# EAGLE board Layer 1 (EAGLE 9.6.2)
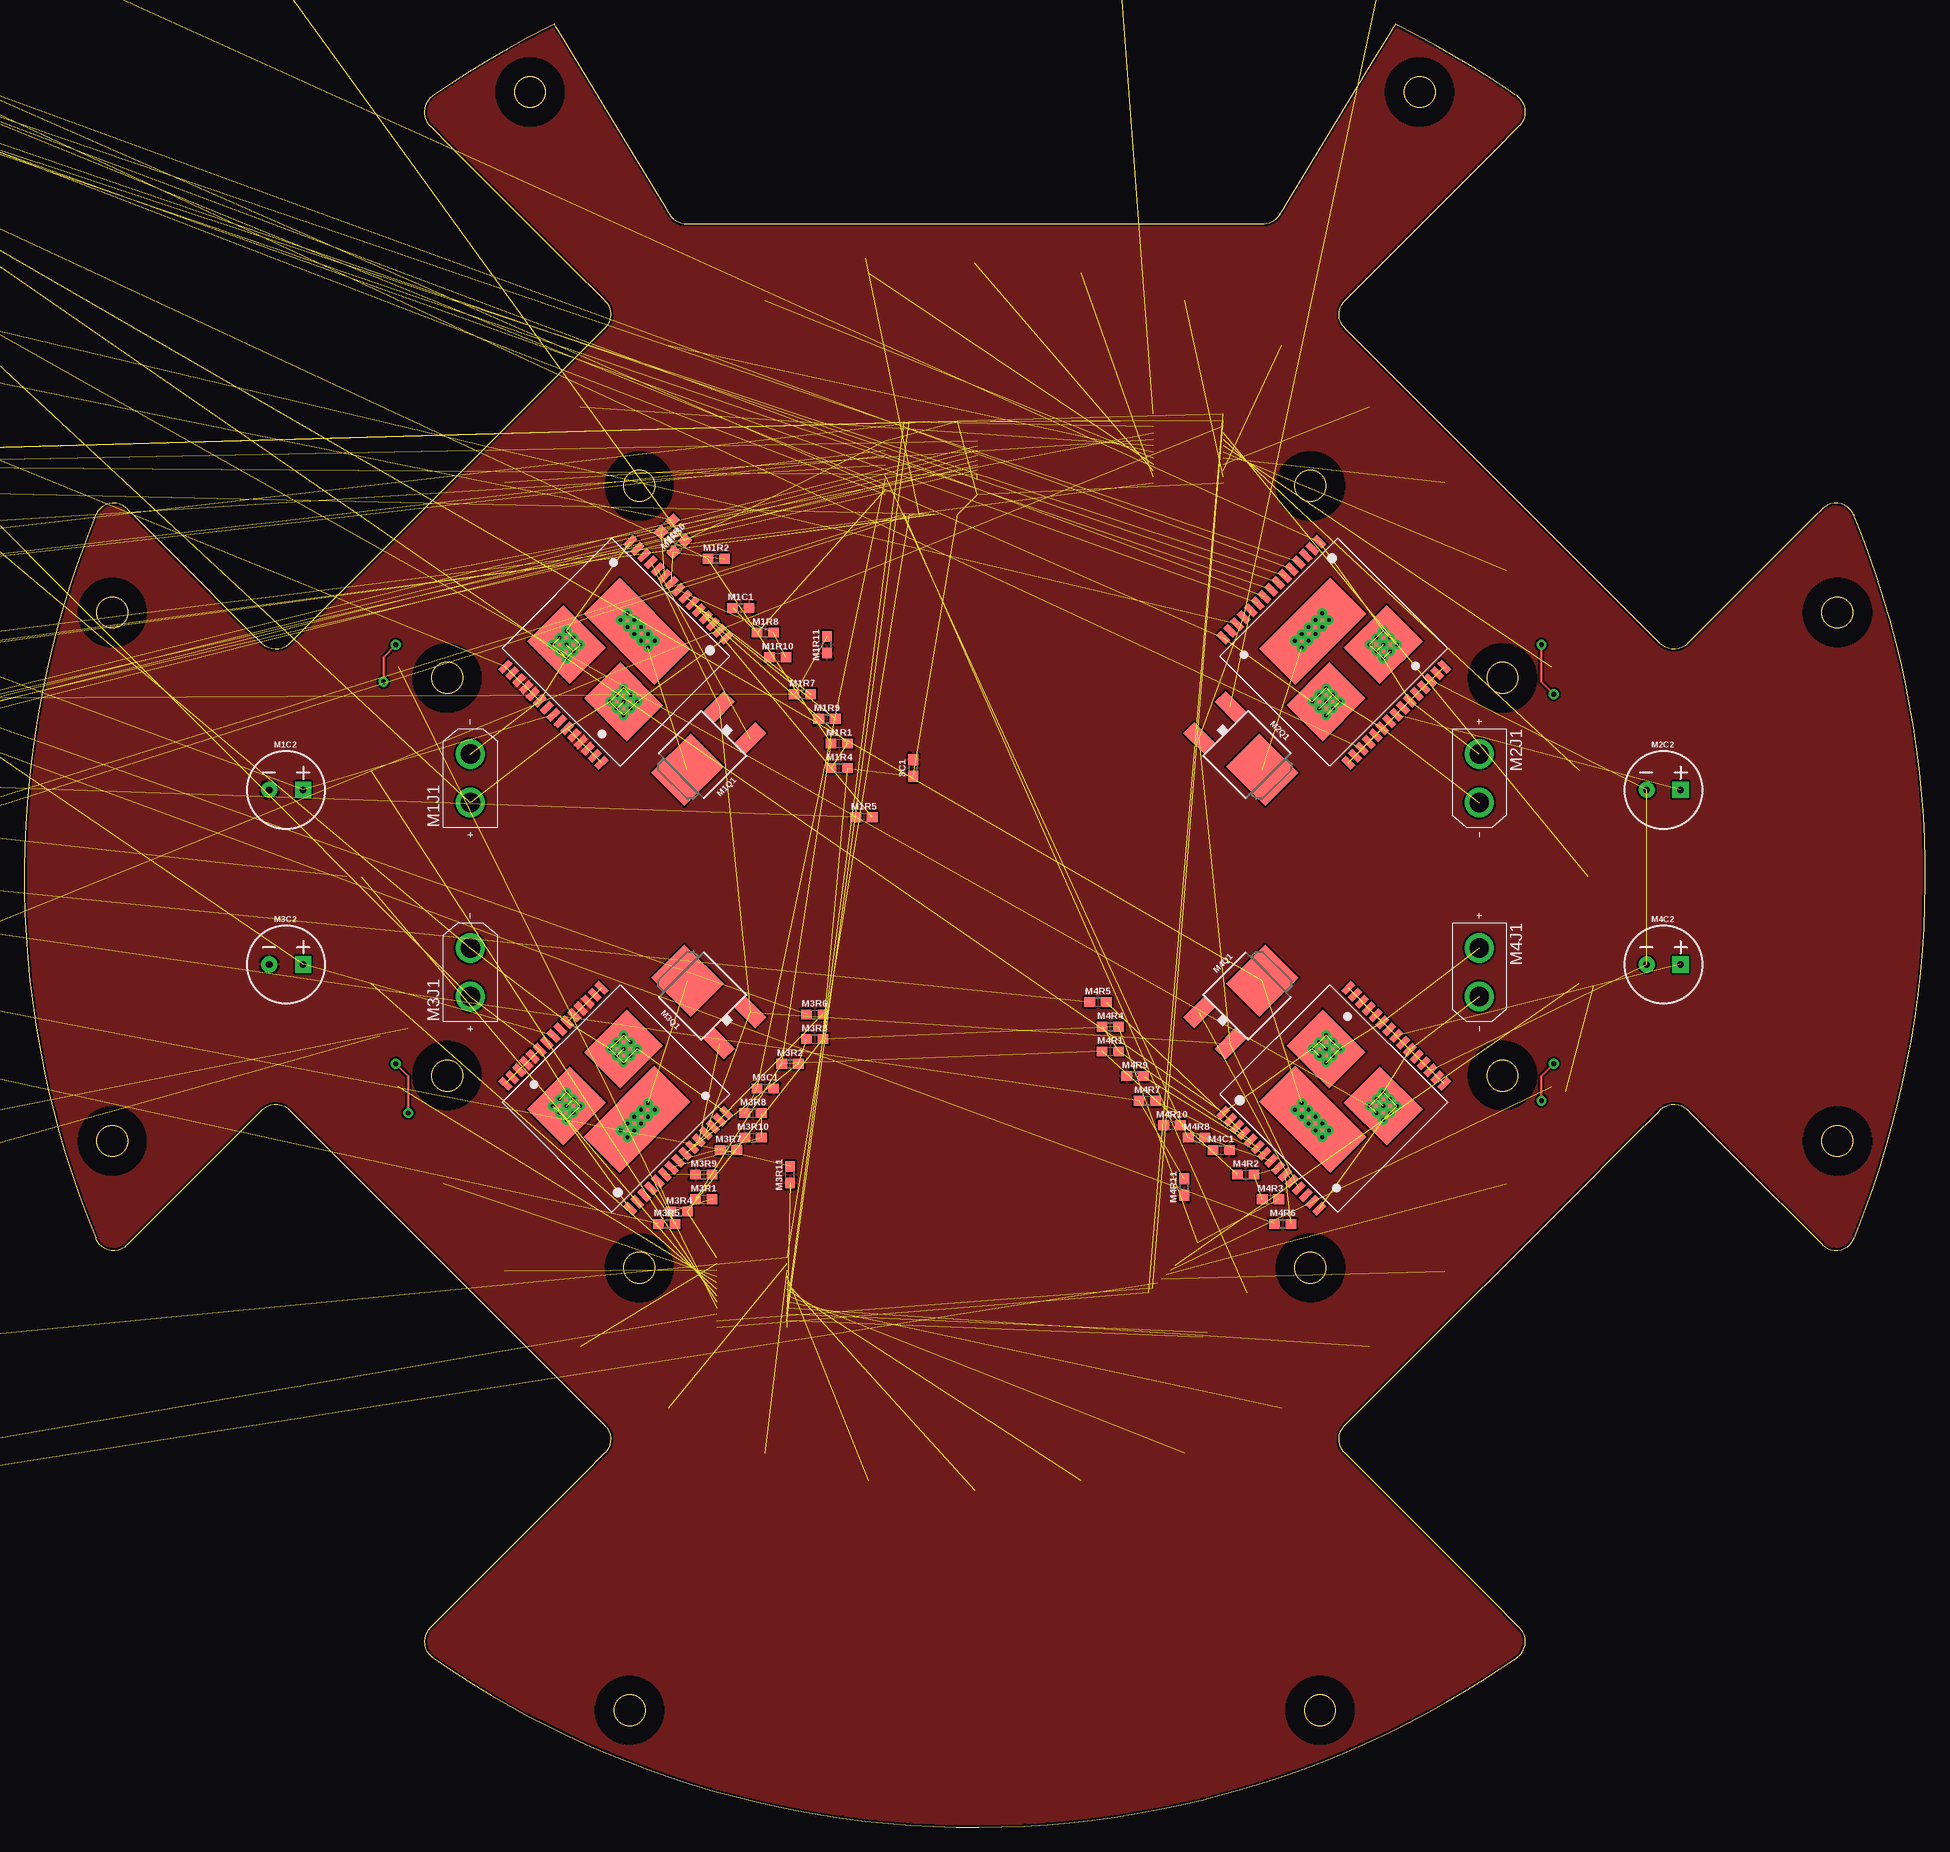
[diagram p0: board, top side]
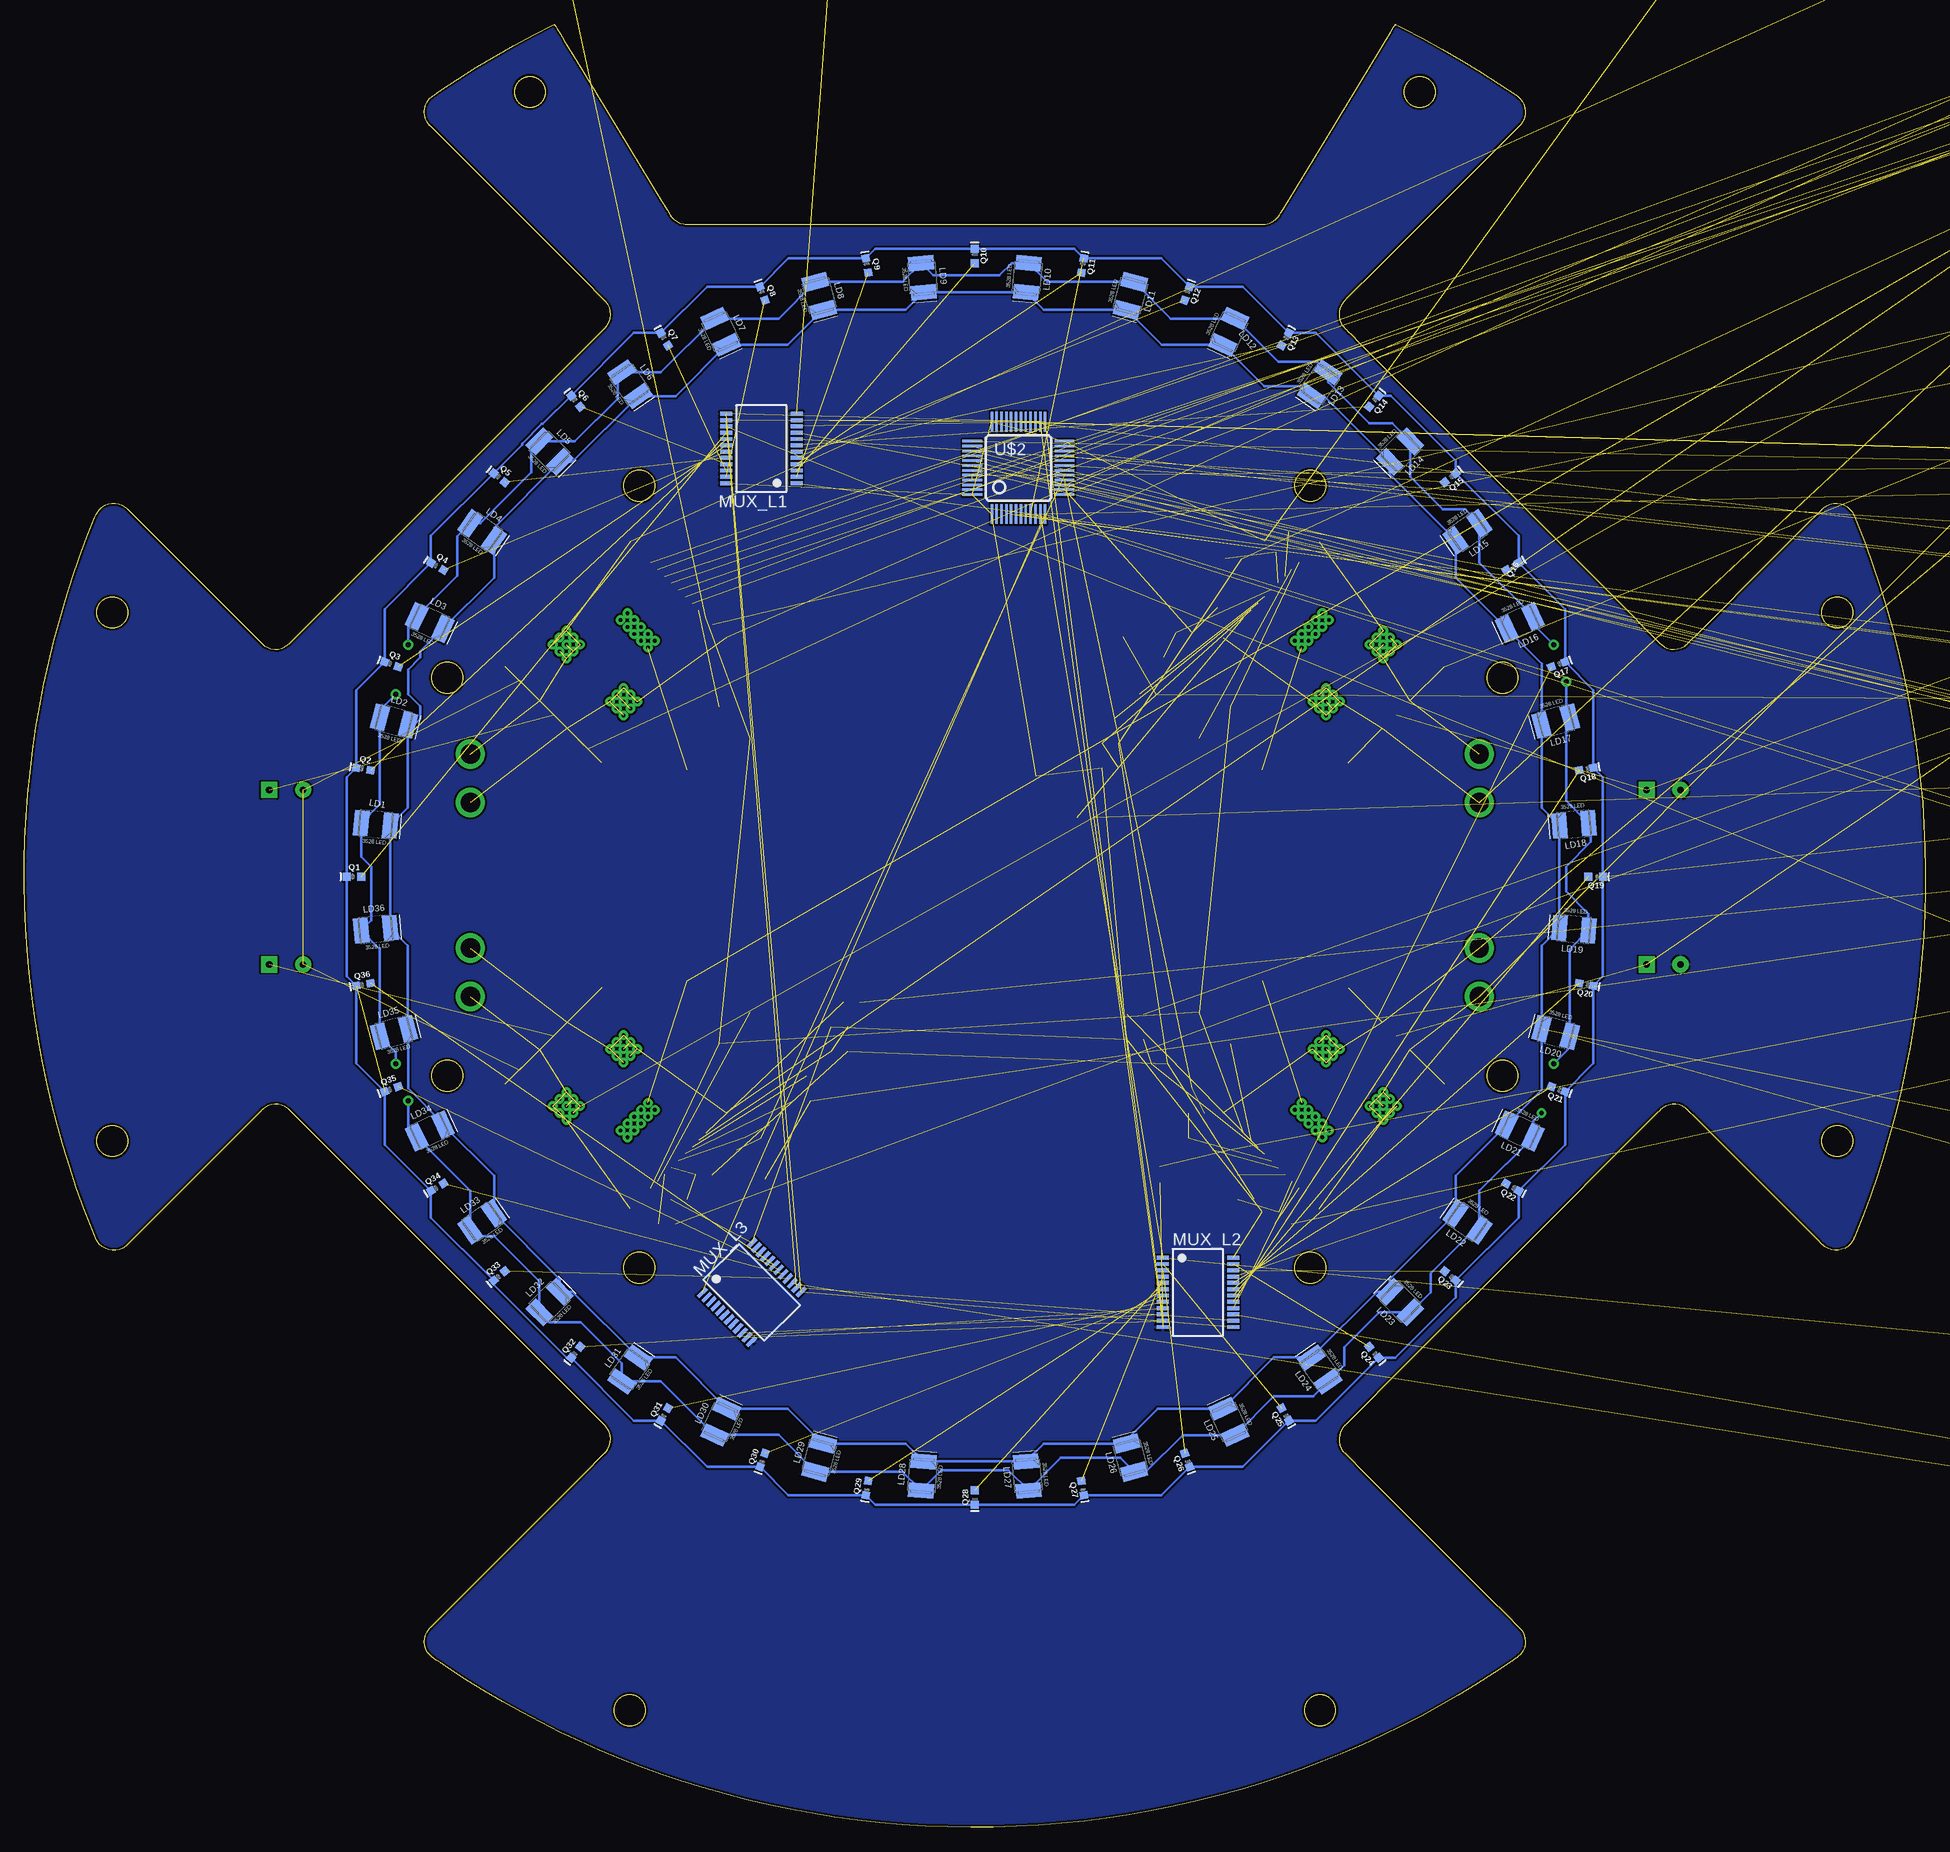
[diagram p1: board, bottom side, seen from below]

Size 195.99 x 185.89 mm. Coordinates in mm from the lower left corner, seen from the top.
Outline: 510 segments
Outline: circle at 186.92,70.75 radius 1.6
Outline: circle at 132.59,57.7 radius 1.6
Outline: circle at 62.41,12.08 radius 1.6
Outline: circle at 43.6,77.49 radius 1.6
Outline: circle at 9.08,125.24 radius 1.6
Outline: circle at 63.4,138.3 radius 1.6
Outline: circle at 143.86,178.91 radius 1.6
Outline: circle at 152.39,118.5 radius 1.6
Outline: circle at 132.59,138.3 radius 1.6
Outline: circle at 52.14,178.91 radius 1.6
Outline: circle at 43.6,118.5 radius 1.6
Outline: circle at 9.08,70.75 radius 1.6
Outline: circle at 63.4,57.7 radius 1.6
Outline: circle at 133.59,12.08 radius 1.6
Outline: circle at 152.39,77.49 radius 1.6
Outline: circle at 186.92,125.24 radius 1.6
Copper layers (1*16): Top 0.035mm / dielectric 1.5mm / Bottom 0.035mm
Design rules "SparkFun *": minimum track width 8mil, minimum drill 20mil, track to track 8mil, track to pad 8mil, pad to pad 8mil, via to via 8mil, smd to smd 8mil, copper to edge 10mil, drill to drill 8mil, minimum pad ring 12mil, minimum via ring 10mil, stop-mask expansion 4mil, vias tented up to drill 25mil, thermal gap 10mil
tRestrict: area 48.6,175.4 to 55.6,182.4; area 140.4,175.4 to 147.4,182.4; area 183.4,121.7 to 190.4,128.7; area 183.4,67.3 to 190.4,74.3; area 130.1,8.6 to 137.1,15.6; area 58.9,8.6 to 65.9,15.6; area 5.6,67.3 to 12.6,74.3; area 5.6,121.7 to 12.6,128.7; area 59.9,134.8 to 66.9,141.8; area 40.1,115 to 47.1,122; area 40.1,74 to 47.1,81; area 59.9,54.2 to 66.9,61.2; 4 more areas

## Footprints (pad centres in the part's own frame; a part is rotated, then mirrored left to right if it is on the bottom)
C0603 = smd 1.1 x 1: 1 -0.85,0; 2 0.85,0
C1210 = smd 1.27 x 2.06: 1 -1.755,0; 2 1.755,0
EIA7343 = smd 2.55 x 2.7: A 3.17,0; C -3.17,0
SMA-DIODE = smd 1.27 x 1.47: A -2.15,0; C 2.15,0
SWPA8040 = smd 2.2 x 7.5: P1 -3,0; P2 3,0
R0603 = smd 1.1 x 1: 1 -0.85,0; 2 0.85,0
MOMENTARY_SWITCH_4X3 = smd 1.3 x 1.6: P$1 -2.25,0; P$2 2.25,0
LED-0603 = smd 1 x 1: A -0.877,0; C 0.877,0
1X03_LOCK = drill 1.016 pad 1.88: 1 0,0.127; 2 2.54,-0.127; 3 5.08,0.127
XT30PB-F = drill 2: + -2.5,0; - 2.5,0
0603 = smd 1.1 x 1: 1 -0.85,0; 2 0.85,0
18AWG = drill 1.3: P$1 0,0
1X02_LOCK = drill 1.016 pad 1.88: 1 -0.178,0; 2 2.718,0
3528 = smd 1.5 x 2.6: A -1.5,0; C 1.5,0
1X02_NO_SILK = drill 1.016 pad 1.88: 1 0,0; 2 2.54,0
MOLEX-1X2 = drill 1.016 pad 1.88 square: 1 0,0 | drill 1.016 pad 1.88: 2 2.54,0
SWITCH_SPDT_PTH_11.6X4.0MM_LOCK = drill 1.016 pad 1.88: 1 0,2.718; 2 0,0; 3 0,-2.718
3.5MM_CAP = drill 0.7 pad 1.651 square: 1 1.75,0 | drill 0.7 pad 1.651: 2 -1.75,0
DPAK = smd 1.6 x 3: 1 -2.28,-5.31; 3 2.28,-5.31 | smd 4.826 x 5.715: 4 0,1.588
POWERSO-30 = smd 0.65 x 1.4: P1 -7,-9.1; P2 -6,-9.1; P3 -5,-9.1; P4 -4,-9.1; P5 -3,-9.1; P6 -2,-9.1; P7 -1,-9.1; P8 0,-9.1; P9 1,-9.1; P10 2,-9.1; P11 3,-9.1; P12 4,-9.1; P13 5,-9.1; P14 6,-9.1; P15 7,-9.1; P16 7,9.1; P17 6,9.1; P18 5,9.1; P19 4,9.1; P20 3,9.1; P21 2,9.1; P22 1,9.1; P23 0,9.1; P24 -1,9.1; P25 -2,9.1; P26 -3,9.1; P27 -4,9.1; P28 -5,9.1; P29 -6,9.1; P30 -7,9.1 | drill 0.381: P$1 -4.165,3.05; P$2 -3.165,3.05; P$3 -5.165,3.05; P$4 -5.165,2.05; P$5 -4.165,2.05; P$6 -3.165,2.05; P$7 -5.165,4.05; P$8 -4.165,4.05; P$9 -3.165,4.05; P$10 4.165,3.05; P$11 5.165,3.05; P$12 3.165,3.05; P$13 3.165,2.05; P$14 4.165,2.05; P$15 5.165,2.05; P$16 3.165,4.05; P$17 4.165,4.05; P$18 5.165,4.05; P$19 0,-2.669; P$20 -1,-2.669; P$21 1,-2.669; P$22 -2,-2.669; P$23 2,-2.669; P$24 0,-3.669; P$25 1,-3.669; P$26 2,-3.669; P$27 -1,-3.669; P$28 -2,-3.669 | smd 10.3 x 5.25: SLUG1 0,-3.05 | smd 6.23 x 5.25: SLUG2 -4.165,3.05; SLUG3 4.165,3.05
1X08_LOCK = drill 1.016 pad 1.88: 1 0,0.127; 2 2.54,-0.127; 3 5.08,0.127; 4 7.62,-0.127; 5 10.16,0.127; 6 12.7,-0.127; 7 15.24,0.127; 8 17.78,-0.127
SOT23-6 = smd 0.55 x 1.2: 1 -0.95,-1.3; 2 0,-1.3; 3 0.95,-1.3; 4 0.95,1.3; 5 0,1.3; 6 -0.95,1.3
SSOP24 = smd 0.4 x 1.25: 1 -3.575,-3.625; 2 -2.925,-3.625; 3 -2.275,-3.625; 4 -1.625,-3.625; 5 -0.975,-3.625; 6 -0.325,-3.625; 7 0.325,-3.625; 8 0.975,-3.625; 9 1.625,-3.625; 10 2.275,-3.625; 11 2.925,-3.625; 12 3.575,-3.625; 13 3.575,3.625; 14 2.925,3.625; 15 2.275,3.625; 16 1.625,3.625; 17 0.975,3.625; 18 0.325,3.625; 19 -0.325,3.625; 20 -0.975,3.625; 21 -1.625,3.625; 22 -2.275,3.625; 23 -2.925,3.625; 24 -3.575,3.625
ALS-PT19 = smd 0.8 x 0.8: C -0.75,0; E 0.75,0
SOT23-3 = smd 0.8 x 0.9: 1 -0.95,-1; 2 0.95,-1; 3 0,1.1
POWERPAD-SOIC-8 = smd 1.981 x 0.559: 1 -2.464,1.905; 2 -2.464,0.635; 3 -2.464,-0.635; 4 -2.464,-1.905; 5 2.464,-1.905; 6 2.464,-0.635; 7 2.464,0.635; 8 2.464,1.905 | smd 2.007 x 2.489: 9 0,0 | drill 0.381: P$1 -0.5,0.8; P$2 0.5,0.8; P$3 -0.5,0; P$4 0.5,0; P$5 -0.5,-0.8; P$6 0.5,-0.8
XT60PB-M = drill 4.4: + -3.6,0; - 3.6,0
LQFP48 = smd 0.254 x 2.032: 1 -2.75,-4.758; 2 -2.25,-4.758; 3 -1.75,-4.758; 4 -1.25,-4.758; 5 -0.75,-4.758; 6 -0.25,-4.758; 7 0.25,-4.758; 8 0.75,-4.758; 9 1.25,-4.758; 10 1.75,-4.758; 11 2.25,-4.758; 12 2.75,-4.758; 25 2.75,4.758; 26 2.25,4.758; 27 1.75,4.758; 28 1.25,4.758; 29 0.75,4.758; 30 0.25,4.758; 31 -0.25,4.758; 32 -0.75,4.758; 33 -1.25,4.758; 34 -1.75,4.758; 35 -2.25,4.758; 36 -2.75,4.758 | smd 2.032 x 0.254: 13 4.758,-2.75; 14 4.758,-2.25; 15 4.758,-1.75; 16 4.758,-1.25; 17 4.758,-0.75; 18 4.758,-0.25; 19 4.758,0.25; 20 4.758,0.75; 21 4.758,1.25; 22 4.758,1.75; 23 4.758,2.25; 24 4.758,2.75; 37 -4.758,2.75; 38 -4.758,2.25; 39 -4.758,1.75; 40 -4.758,1.25; 41 -4.758,0.75; 42 -4.758,0.25; 43 -4.758,-0.25; 44 -4.758,-0.75; 45 -4.758,-1.25; 46 -4.758,-1.75; 47 -4.758,-2.25; 48 -4.758,-2.75
2X7 = drill 1.016 pad 1.88: 1 0,0; 2 0,2.54; 3 2.54,0; 4 2.54,2.54; 5 5.08,0; 6 5.08,2.54; 7 7.62,0; 8 7.62,2.54; 9 10.16,0; 10 10.16,2.54; 11 12.7,0; 12 12.7,2.54; 13 15.24,0; 14 15.24,2.54
SM06B-SRSS-TB = smd 0.6 x 1.55: 1 2.5,0; 2 1.5,0; 3 0.5,0; 4 -0.5,0; 5 -1.5,0; 6 -2.5,0 | smd 1.2 x 1.8: M1 3.8,3.875; M2 -3.8,3.875
CRYSTAL-SMD-5X3.2-2PAD = smd 1.7 x 2.4: P$1 1.85,0; P$2 -1.85,0

## Placement (x,y rotation side)
1C1  4.7uF  [C0603]  not placed on the board
1C2  22uF  [C1210]  not placed on the board
1C3  10nF  [C0603]  not placed on the board
1C4  220uF  [EIA7343]  not placed on the board
1C5  0.1uF  [C0603]  not placed on the board
1C6  4.7uF  [C0603]  not placed on the board
1C7  220uF  [EIA7343]  not placed on the board
1C8  10nF  [C0603]  not placed on the board
1C9  0.1uF  [C0603]  not placed on the board
1C10  22uF  [C1210]  not placed on the board
1D1  SS54  [SMA-DIODE]  not placed on the board
1D2  SS54  [SMA-DIODE]  not placed on the board
1L1  10uH  [SWPA8040]  not placed on the board
1L2  10uH  [SWPA8040]  not placed on the board
1R1  10k  [R0603]  not placed on the board
1R2  5.9k  [R0603]  not placed on the board
1R3  10k  [R0603]  not placed on the board
1R4  3.24k  [R0603]  not placed on the board
2C1  0.1uF  [C0603]  not placed on the board
2C2  0.1uF  [C0603]  not placed on the board
2C3  0.1uF  [C0603]  not placed on the board
2C4  1uF  [C0603]  not placed on the board
2C5  1uF  [C0603]  not placed on the board
2C6  1uF  [C0603]  not placed on the board
2R1  1k  [R0603]  not placed on the board
2R2  1k  [R0603]  not placed on the board
2R3  1k  [R0603]  not placed on the board
2R4  3k  [R0603]  not placed on the board
2R5  3k  [R0603]  not placed on the board
2R6  3k  [R0603]  not placed on the board
3C1  0.1uF  [C0603]  91.65,109.21 90 top
3C2  0.1uF  [C0603]  not placed on the board
BOOT  MOMENTARY_SWITCH_4X3  [MOMENTARY_SWITCH_4X3]  not placed on the board
C1  1uF  [C0603]  not placed on the board
C2  1uF  [C0603]  not placed on the board
C3  1uF  [C0603]  not placed on the board
C4  10nF  [C0603]  not placed on the board
C5  1uF  [C0603]  not placed on the board
C6  22pF  [C0603]  not placed on the board
C7  22pF  [C0603]  not placed on the board
C8  1uF  [C0603]  not placed on the board
D1  BLUE  [LED-0603]  not placed on the board
ESC_IN  [1X03_LOCK]  not placed on the board
ESC_OUT  XT30PB-F  [XT30PB-F]  not placed on the board
FB1  30Ω/1.8A  [0603]  not placed on the board
FB2  30Ω/1.8A  [0603]  not placed on the board
GND_M2A  18AWG  [18AWG]  not placed on the board
GND_M2B  18AWG  [18AWG]  not placed on the board
GND_M4A  18AWG  [18AWG]  not placed on the board
GND_M4B  18AWG  [18AWG]  not placed on the board
J1  [1X02_LOCK]  not placed on the board
LC1  1uF  [C0603]  not placed on the board
LC2  1uF  [C0603]  not placed on the board
LC3  1uF  [C0603]  not placed on the board
LC4  1uF  [C0603]  not placed on the board
LC5  1uF  [C0603]  not placed on the board
LC6  1uF  [C0603]  not placed on the board
LD1  3528LED  [3528]  159.76,103.4 355 bottom
LD2  3528LED  [3528]  157.88,114.05 345 bottom
LD3  3528LED  [3528]  154.19,124.2 335 bottom
LD4  3528LED  [3528]  148.78,133.56 325 bottom
LD5  3528LED  [3528]  141.84,141.84 315 bottom
LD6  3528LED  [3528]  133.56,148.79 305 bottom
LD7  3528LED  [3528]  124.2,154.19 295 bottom
LD8  3528LED  [3528]  114.04,157.89 285 bottom
LD9  3528LED  [3528]  103.4,159.76 275 bottom
LD10  3528LED  [3528]  92.59,159.76 265 bottom
LD11  3528LED  [3528]  81.95,157.89 255 bottom
LD12  3528LED  [3528]  71.79,154.19 245 bottom
LD13  3528LED  [3528]  62.44,148.79 235 bottom
LD14  3528LED  [3528]  54.16,141.84 225 bottom
LD15  3528LED  [3528]  47.21,133.56 215 bottom
LD16  3528LED  [3528]  41.81,124.2 205 bottom
LD17  3528LED  [3528]  38.11,114.05 195 bottom
LD18  3528LED  [3528]  36.23,103.4 185 bottom
LD19  3528LED  [3528]  36.23,92.6 175 bottom
LD20  3528LED  [3528]  38.11,81.95 165 bottom
LD21  3528LED  [3528]  41.81,71.8 155 bottom
LD22  3528LED  [3528]  47.21,62.44 145 bottom
LD23  3528LED  [3528]  54.16,54.16 135 bottom
LD24  3528LED  [3528]  62.44,47.21 125 bottom
LD25  3528LED  [3528]  71.79,41.81 115 bottom
LD26  3528LED  [3528]  81.95,38.11 105 bottom
LD27  3528LED  [3528]  92.59,36.24 95 bottom
LD28  3528LED  [3528]  103.4,36.24 85 bottom
LD29  3528LED  [3528]  114.04,38.11 75 bottom
LD30  3528LED  [3528]  124.2,41.81 65 bottom
LD31  3528LED  [3528]  133.56,47.21 55 bottom
LD32  3528LED  [3528]  141.84,54.16 45 bottom
LD33  3528LED  [3528]  148.78,62.44 35 bottom
LD34  3528LED  [3528]  154.19,71.8 25 bottom
LD35  3528LED  [3528]  157.88,81.95 15 bottom
LD36  3528LED  [3528]  159.76,92.6 5 bottom
LDR  [1X02_NO_SILK]  not placed on the board
LED  [MOLEX-1X2]  not placed on the board
LG_R2  2k  [R0603]  not placed on the board
LR1  47  [R0603]  not placed on the board
LS1  [SWITCH_SPDT_PTH_11.6X4.0MM_LOCK]  not placed on the board
M1C1  33nF  [C0603]  73.87,125.72 0 top
M1C2  680uF  [3.5MM_CAP]  27,106.96 0 top
M1C3  1.0uF  [C0603]  not placed on the board
M1D1  RED  [LED-0603]  not placed on the board
M1D2  BLUE  [LED-0603]  not placed on the board
M1J1  XT30PB-F  [XT30PB-F]  46,108.16 90 top
M1Q1  AOD482  [DPAK]  69.5,110.16 135 top
M1R1  1k  [R0603]  84.03,111.75 0 top
M1R2  1k  [R0603]  71.33,130.8 0 top
M1R3  3.3k  [R0603]  67.52,132.07 45 top
M1R4  3.3k  [R0603]  84.03,109.21 0 top
M1R5  1k  [R0603]  86.57,104.13 0 top
M1R6  1k  [R0603]  66.25,134.16 225 top
M1R7  1k  [R0603]  80.22,116.83 0 top
M1R8  10k  [R0603]  76.41,123.18 0 top
M1R9  10k  [R0603]  82.76,114.29 0 top
M1R10  1k  [R0603]  77.68,120.64 0 top
M1R11  10k  [R0603]  82.76,121.91 90 top
M1R12  4.7k  [R0603]  not placed on the board
M2C1  33nF  [C0603]  not placed on the board
M2C2  680uF  [3.5MM_CAP]  169,106.96 0 top
M2C3  1.0uF  [C0603]  not placed on the board
M2D1  RED  [LED-0603]  not placed on the board
M2D2  BLUE  [LED-0603]  not placed on the board
M2J1  XT30PB-F  [XT30PB-F]  150,108.16 270 top
M2Q1  AOD482  [DPAK]  126.5,110.16 225 top
M2R1  1k  [R0603]  not placed on the board
M2R2  1k  [R0603]  not placed on the board
M2R3  3.3k  [R0603]  not placed on the board
M2R4  3.3k  [R0603]  not placed on the board
M2R5  1k  [R0603]  not placed on the board
M2R6  1k  [R0603]  not placed on the board
M2R7  1k  [R0603]  not placed on the board
M2R8  10k  [R0603]  not placed on the board
M2R9  10k  [R0603]  not placed on the board
M2R10  1k  [R0603]  not placed on the board
M2R11  10k  [R0603]  not placed on the board
M2R12  4.7k  [R0603]  not placed on the board
M3C1  33nF  [C0603]  76.41,76.19 0 top
M3C2  680uF  [3.5MM_CAP]  27,88.96 0 top
M3C3  1.0uF  [C0603]  not placed on the board
M3D1  RED  [LED-0603]  not placed on the board
M3D2  BLUE  [LED-0603]  not placed on the board
M3J1  XT30PB-F  [XT30PB-F]  46,88.16 90 top
M3Q1  AOD482  [DPAK]  69.5,86.16 45 top
M3R1  1k  [R0603]  70.06,64.76 0 top
M3R2  1k  [R0603]  78.95,78.73 0 top
M3R3  3.3k  [R0603]  81.49,81.27 0 top
M3R4  3.3k  [R0603]  67.52,63.49 0 top
M3R5  1k  [R0603]  66.25,62.22 0 top
M3R6  1k  [R0603]  81.49,83.81 0 top
M3R7  1k  [R0603]  72.6,69.84 0 top
M3R8  10k  [R0603]  75.14,73.65 0 top
M3R9  10k  [R0603]  70.06,67.3 0 top
M3R10  1k  [R0603]  75.14,71.11 0 top
M3R11  10k  [R0603]  78.95,67.3 90 top
M3R12  4.7k  [R0603]  not placed on the board
M4C1  33nF  [C0603]  123.4,69.84 0 top
M4C2  680uF  [3.5MM_CAP]  169,88.96 0 top
M4C3  1.0uF  [C0603]  not placed on the board
M4D1  RED  [LED-0603]  not placed on the board
M4D2  BLUE  [LED-0603]  not placed on the board
M4J1  XT30PB-F  [XT30PB-F]  150,88.16 270 top
M4Q1  AOD482  [DPAK]  126.5,86.16 315 top
M4R1  1k  [R0603]  111.97,80 0 top
M4R2  1k  [R0603]  125.94,67.3 0 top
M4R3  3.3k  [R0603]  128.48,64.76 0 top
M4R4  3.3k  [R0603]  111.97,82.54 0 top
M4R5  1k  [R0603]  110.7,85.08 0 top
M4R6  1k  [R0603]  129.75,62.22 0 top
M4R7  1k  [R0603]  115.78,74.92 0 top
M4R8  10k  [R0603]  120.86,71.11 0 top
M4R9  10k  [R0603]  114.51,77.46 0 top
M4R10  1k  [R0603]  118.32,72.38 0 top
M4R11  10k  [R0603]  119.59,66.03 90 top
M4R12  4.7k  [R0603]  not placed on the board
M_BL  VNH5019  [POWERSO-30]  61,75.16 45 top
M_BR  VNH5019  [POWERSO-30]  135,75.16 315 top
M_FL  VNH5019  [POWERSO-30]  61,121.16 135 top
M_FR  VNH5019  [POWERSO-30]  135,121.16 225 top
MOUSE  [1X08_LOCK]  not placed on the board
MU1  [SOT23-6]  not placed on the board
MU2  [SOT23-6]  not placed on the board
MUX_L1  [SSOP24]  120,142.16 90 bottom
MUX_L2  [SSOP24]  75,55.16 270 bottom
MUX_L3  [SSOP24]  121,55.16 315 bottom
Q1  [ALS-PT19]  162,98 0 bottom
Q2  [ALS-PT19]  161.02,109.11 350 bottom
Q3  [ALS-PT19]  158.14,119.89 340 bottom
Q4  [ALS-PT19]  153.42,130 330 bottom
Q5  [ALS-PT19]  147.02,139.14 320 bottom
Q6  [ALS-PT19]  139.14,147.03 310 bottom
Q7  [ALS-PT19]  130,153.42 300 bottom
Q8  [ALS-PT19]  119.89,158.14 290 bottom
Q9  [ALS-PT19]  109.11,161.03 280 bottom
Q10  [ALS-PT19]  98,162 270 bottom
Q11  [ALS-PT19]  86.88,161.03 260 bottom
Q12  [ALS-PT19]  76.11,158.14 250 bottom
Q13  [ALS-PT19]  66,153.42 240 bottom
Q14  [ALS-PT19]  56.86,147.03 230 bottom
Q15  [ALS-PT19]  48.97,139.14 220 bottom
Q16  [ALS-PT19]  42.57,130 210 bottom
Q17  [ALS-PT19]  37.86,119.89 200 bottom
Q18  [ALS-PT19]  34.97,109.11 190 bottom
Q19  [ALS-PT19]  34,98 180 bottom
Q20  [ALS-PT19]  34.97,86.89 170 bottom
Q21  [ALS-PT19]  37.86,76.11 160 bottom
Q22  [ALS-PT19]  42.57,66 150 bottom
Q23  [ALS-PT19]  48.97,56.86 140 bottom
Q24  [ALS-PT19]  56.86,48.97 130 bottom
Q25  [ALS-PT19]  66,42.57 120 bottom
Q26  [ALS-PT19]  76.11,37.86 110 bottom
Q27  [ALS-PT19]  86.88,34.97 100 bottom
Q28  [ALS-PT19]  98,34 90 bottom
Q29  [ALS-PT19]  109.11,34.97 80 bottom
Q30  [ALS-PT19]  119.89,37.86 70 bottom
Q31  [ALS-PT19]  130,42.57 60 bottom
Q32  [ALS-PT19]  139.14,48.97 50 bottom
Q33  [ALS-PT19]  147.02,56.86 40 bottom
Q34  [ALS-PT19]  153.42,66 30 bottom
Q35  [ALS-PT19]  158.14,76.11 20 bottom
Q36  [ALS-PT19]  161.02,86.89 10 bottom
Q37  AO3402  [SOT23-3]  not placed on the board
R1  10k  [R0603]  not placed on the board
R2  1k  [R0603]  not placed on the board
R3  1k  [R0603]  not placed on the board
R4  10k  [R0603]  not placed on the board
R5  470  [R0603]  not placed on the board
R6  2M  [R0603]  not placed on the board
R7  500k  [R0603]  not placed on the board
R8  4.7k  [R0603]  not placed on the board
R9  4.7k  [R0603]  not placed on the board
RST  MOMENTARY_SWITCH_4X3  [MOMENTARY_SWITCH_4X3]  not placed on the board
S3  [SWITCH_SPDT_PTH_11.6X4.0MM_LOCK]  not placed on the board
U1  [POWERPAD-SOIC-8]  not placed on the board
U2  [POWERPAD-SOIC-8]  not placed on the board
U$1  XT60XT60PB-M  [XT60PB-M]  not placed on the board
U$2  STM32F103CBT6  [LQFP48]  93.5,140.16 0 bottom
U$15  CONN_07X2  [2X7]  not placed on the board
V_BATT_M1A  18AWG  [18AWG]  not placed on the board
V_BATT_M1B  18AWG  [18AWG]  not placed on the board
V_BATT_M2A  18AWG  [18AWG]  not placed on the board
V_BATT_M2B  18AWG  [18AWG]  not placed on the board
V_BATT_M3A  18AWG  [18AWG]  not placed on the board
V_BATT_M3B  18AWG  [18AWG]  not placed on the board
V_BATT_M4A  18AWG  [18AWG]  not placed on the board
V_BATT_M4B  18AWG  [18AWG]  not placed on the board
X2  SM06B-SRSS-TB  [SM06B-SRSS-TB]  not placed on the board
Y1  8MHz  [CRYSTAL-SMD-5X3.2-2PAD]  not placed on the board

## Library data of the parts
1C1-1C3 1C5 1C6 1C8-1C10 1D1 1D2 1L1 1L2 1R1-1R4 2C1-2C6 2R1-2R6 3C1 3C2 C1-C8 ESC_OUT GND_M2A GND_M2B GND_M4A GND_M4B LC1-LC6 LD1-LD36 LG_R2 LR1 M1C1 M1C3 M1J1 M1R1-M1R12 M2C1 M2C3 M2J1 M2R1-M2R12 M3C1 M3C3 M3J1 M3R1-M3R12 M4C1 M4C3 M4J1 M4R1-M4R12 M_BL M_BR M_FL M_FR MUX_L1-MUX_L3 R1-R9 U1 U2 U$1 U$2 V_BATT_M1A V_BATT_M1B V_BATT_M2A V_BATT_M2B V_BATT_M3A V_BATT_M3B V_BATT_M4A V_BATT_M4B = JH
1C4 1C7 = SparkFun-Capacitors; PROD_ID: CAP-07890
BOOT M1C2 M2C2 M3C2 M4C2 MU1 MU2 RST U$15 = MY-LIBRARY
D1 = SparkFun-LED
ESC_IN LDR MOUSE = SparkFun-Connectors
FB1 FB2 = SparkFun-Coils; PROD_ID: NDUC-13805
J1 = Connectors
LED = SparkFun-Connectors; SF_ID: PRT-09918
LS1 S3 = SparkFun-Switches; PROD_ID: SWCH-08261; SF_SKU: COM-00102
M1D1 M2D1 M3D1 M4D1 = SparkFun-LED; PROD_ID: DIO-00819
M1D2 M2D2 M3D2 M4D2 = SparkFun-LED; PROD_ID: DIO-08575
M1Q1 M2Q1 M3Q1 M4Q1 = SparkFun-DiscreteSemi; PROD_ID: TRANS-09984
Q1-Q36 = SparkFun-Sensors; PROD_ID: IC-11836; SF_ID: SEN-12566
Q37 = SparkFun-DiscreteSemi; PROD_ID: TRANS-12988
X2 = con-JST SH
Y1 = SparkFun-Clocks

## Nets
3.3V: 1C4.A 1C5.1 1L1.P2 1R1.2 2C1.1 2C2.1 2C3.1 3C1.1 3C2.1 C1.1 C2.1 C3.1 C8.1 FB1.1 LS1.2 M1R3.2 M1R4.2 M2R3.2 M2R4.2 M3R3.2 M3R4.2 M4R3.2 M4R4.2 MOUSE.1 MU1.5 MU2.5 MUX_L1.24 MUX_L2.24 MUX_L3.24 R1.2 R3.2 U$2.1 U$2.24 U$2.36 U$2.48 U$15.13 X2.4
3.3V1: Q37.1 R9.1
5V: 1C7.A 1C9.1 1L2.P2 1R3.2 J1.2 R8.1
AGND: 2C4.2 2C5.2 2C6.2 2R4.1 2R5.1 2R6.1 C4.1 C5.1 FB2.2 U$2.8
BATT_LVL: R6.1 R7.2 U$15.12
BL_CS: M3C1.1 M3R8.1 U$2.16
BL_DIR: M3R5.1 MU2.1 U$15.5
BL_OUTA: M3D1.C M3D2.A M3J1.+ M_BL.P1 M_BL.P25 M_BL.P30 M_BL.P$1 M_BL.P$2 M_BL.P$3 M_BL.P$4 M_BL.P$5 M_BL.P$6 M_BL.P$7 M_BL.P$8 M_BL.P$9 M_BL.SLUG2
BL_OUTB: M3J1.- M3R12.2 M_BL.P15 M_BL.P16 M_BL.P21 M_BL.P$10 M_BL.P$11 M_BL.P$12 M_BL.P$13 M_BL.P$14 M_BL.P$15 M_BL.P$16 M_BL.P$17 M_BL.P$18 M_BL.SLUG3
BL_PWM: M3R7.1 M3R11.2 U$15.6
BOOT0: BOOT.P$2 R4.2 U$2.44 U$2.45
BR_CS: M4C1.1 M4R8.1 U$2.17
BR_DIR: M4R5.1 MU2.3 U$15.7
BR_OUTA: M4D1.C M4D2.A M4J1.+ M_BR.P1 M_BR.P25 M_BR.P30 M_BR.P$1 M_BR.P$2 M_BR.P$3 M_BR.P$4 M_BR.P$5 M_BR.P$6 M_BR.P$7 M_BR.P$8 M_BR.P$9 M_BR.SLUG2
BR_OUTB: M4J1.- M4R12.2 M_BR.P15 M_BR.P16 M_BR.P21 M_BR.P$10 M_BR.P$11 M_BR.P$12 M_BR.P$13 M_BR.P$14 M_BR.P$15 M_BR.P$16 M_BR.P$17 M_BR.P$18 M_BR.SLUG3
BR_PWM: M4R7.1 M4R11.2 U$15.8
ESC_HV: ESC_IN.3 Q37.3 R8.2
ESC_LV: J1.1 Q37.2 R9.2
FL_CS: M1C1.1 M1R8.1 U$2.14
FL_DIR: M1R5.1 MU1.1 U$15.1
FL_OUTA: M1D1.C M1D2.A M1J1.+ M_FL.P1 M_FL.P25 M_FL.P30 M_FL.P$1 M_FL.P$2 M_FL.P$3 M_FL.P$4 M_FL.P$5 M_FL.P$6 M_FL.P$7 M_FL.P$8 M_FL.P$9 M_FL.SLUG2
FL_OUTB: M1J1.- M1R12.2 M_FL.P15 M_FL.P16 M_FL.P21 M_FL.P$10 M_FL.P$11 M_FL.P$12 M_FL.P$13 M_FL.P$14 M_FL.P$15 M_FL.P$16 M_FL.P$17 M_FL.P$18 M_FL.SLUG3
FL_PWM: M1R7.1 M1R11.2 U$15.2
FR_CS: M2C1.1 M2R8.1 U$2.15
FR_DIR: M2R5.1 MU1.3 U$15.3
FR_OUTA: M2D1.C M2D2.A M2J1.+ M_FR.P1 M_FR.P25 M_FR.P30 M_FR.P$1 M_FR.P$2 M_FR.P$3 M_FR.P$4 M_FR.P$5 M_FR.P$6 M_FR.P$7 M_FR.P$8 M_FR.P$9 M_FR.SLUG2
FR_OUTB: M2J1.- M2R12.2 M_FR.P15 M_FR.P16 M_FR.P21 M_FR.P$10 M_FR.P$11 M_FR.P$12 M_FR.P$13 M_FR.P$14 M_FR.P$15 M_FR.P$16 M_FR.P$17 M_FR.P$18 M_FR.SLUG3
FR_PWM: M2R7.1 M2R11.2 U$15.4
GND: 1C1.2 1C2.2 1C4.C 1C5.2 1C6.2 1C7.C 1C9.2 1C10.2 1D1.A 1D2.A 1R2.1 1R4.1 2C1.2 2C2.2 2C3.2 2R1.1 2R2.1 2R3.1 3C1.2 3C2.2 C1.2 C2.2 C3.2 C6.1 C7.1 C8.2 D1.C ESC_IN.1 ESC_OUT.- FB2.1 GND_M2B.P$1 GND_M4B.P$1 LC1.2 LC2.2 LC3.2 LC4.2 LC5.2 LC6.2 LED.1 LG_R2.1 LR1.2 M1C1.2 M1C2.2 M1C3.2 M1R9.1 M1R10.1 M1R11.1 M2C1.2 M2R9.1 M2R10.1 M2R11.1 M3C1.2 M3C2.2 M3C3.2 M3R9.1 M3R10.1 M3R11.1 M4C1.2 M4R9.1 M4R10.1 M4R11.1 M_BL.P18 M_BL.P19 M_BL.P20 M_BL.P26 M_BL.P27 M_BL.P28 M_FL.P18 M_FL.P19 M_FL.P20 M_FL.P26 M_FL.P27 M_FL.P28 MOUSE.2 MU1.2 MU2.2 MUX_L1.12 MUX_L2.12 MUX_L3.12 R2.1 R4.1 R7.1 S3.1 U1.6 U1.9 U1.P$1 U1.P$2 U1.P$3 U1.P$4 U1.P$5 U1.P$6 U2.6 U2.9 U2.P$1 U2.P$2 U2.P$3 U2.P$4 U2.P$5 U2.P$6 U$1.- U$2.23 U$2.35 U$2.47 U$15.14 X2.1
GND_M: GND_M2A.P$1 GND_M4A.P$1 M2C2.2 M2C3.2 M4C2.2 M4C3.2 M_BR.P18 M_BR.P19 M_BR.P20 M_BR.P26 M_BR.P27 M_BR.P28 M_FR.P18 M_FR.P19 M_FR.P20 M_FR.P26 M_FR.P27 M_FR.P28
LG_SIG: LDR.2 LG_R2.2 U$2.13
LIGHT_INT: U$2.29 U$15.10
LS0: MUX_L1.10 MUX_L2.10 MUX_L3.10 U$2.25
LS1: MUX_L1.11 MUX_L2.11 MUX_L3.11 U$2.26
LS2: MUX_L1.14 MUX_L2.14 MUX_L3.14 U$2.27
LS3: MUX_L1.13 MUX_L2.13 MUX_L3.13 U$2.28
LSIG1: 2C4.1 2R4.2 MUX_L1.1 U$2.10
LSIG2: 2C5.1 2R5.2 MUX_L2.1 U$2.11
LSIG3: 2C6.1 2R6.2 MUX_L3.1 U$2.12
LSWITCH: LC1.1 LC2.1 LC3.1 LC4.1 LC5.1 LC6.1 LD1.A LD2.A LD3.A LD4.A LD5.A LD6.A LD7.A LD8.A LD9.A LD10.A LD11.A LD12.A LD13.A LD14.A LD15.A LD16.A LD17.A LD18.A LD19.A LD20.A LD21.A LD22.A LD23.A LD24.A LD25.A LD26.A LD27.A LD28.A LD29.A LD30.A LD31.A LD32.A LD33.A LD34.A LD35.A LD36.A LED.2 LS1.1
M_SWITCH: M1R1.1 M1R2.1 M2R1.1 M2R2.1 M3R1.1 M3R2.1 M4R1.1 M4R2.1 S3.2
MISO: MOUSE.7 U$2.40
MOSI: MOUSE.8 U$2.41
MOT: MOUSE.4 U$2.43
N$1: 1C3.1 U1.1
N$2: 1C3.2 1D1.C 1L1.P1 U1.8
N$3: 1C8.2 1D2.C 1L2.P1 U2.8
N$4: 1R1.1 1R2.2 U1.4
N$5: 1R3.1 1R4.2 U2.4
N$6: 1C8.1 U2.1
N$7: ESC_IN.2
N$11: M1R1.2 M1R4.1 M_FL.P5
N$12: M1R2.2 M1R3.1 M_FL.P9
N$13: M1R5.2 M_FL.P4
N$14: M1R6.2 M_FL.P10
N$15: M1R7.2 M_FL.P7
N$16: M1R8.2 M1R10.2 M_FL.P8
N$17: M1R9.2 M_FL.P6
N$18: M1C2.1 M1C3.1 M1Q1.4 M_FL.P3 M_FL.P13 M_FL.P23 M_FL.P$19 M_FL.P$20 M_FL.P$21 M_FL.P$22 M_FL.P$23 M_FL.P$24 M_FL.P$25 M_FL.P$26 M_FL.P$27 M_FL.P$28 M_FL.SLUG1
N$19: M1Q1.1 M_FL.P11
N$20: M2R2.2 M2R3.1 M_FR.P9
N$21: M1D1.A M1D2.C M1R12.1
N$22: M2R1.2 M2R4.1 M_FR.P5
N$23: M2R6.2 M_FR.P10
N$24: M2R5.2 M_FR.P4
N$25: M2R7.2 M_FR.P7
N$26: M2R8.2 M2R10.2 M_FR.P8
N$27: M2R9.2 M_FR.P6
N$28: M2C2.1 M2C3.1 M2Q1.4 M_FR.P3 M_FR.P13 M_FR.P23 M_FR.P$19 M_FR.P$20 M_FR.P$21 M_FR.P$22 M_FR.P$23 M_FR.P$24 M_FR.P$25 M_FR.P$26 M_FR.P$27 M_FR.P$28 M_FR.SLUG1
N$29: M2Q1.1 M_FR.P11
N$30: M3R2.2 M3R3.1 M_BL.P9
N$31: M2D1.A M2D2.C M2R12.1
N$32: M3R1.2 M3R4.1 M_BL.P5
N$33: M3R6.2 M_BL.P10
N$34: M3R5.2 M_BL.P4
N$35: M3R7.2 M_BL.P7
N$36: M3R8.2 M3R10.2 M_BL.P8
N$37: M3R9.2 M_BL.P6
N$38: M3C2.1 M3C3.1 M3Q1.4 M_BL.P3 M_BL.P13 M_BL.P23 M_BL.P$19 M_BL.P$20 M_BL.P$21 M_BL.P$22 M_BL.P$23 M_BL.P$24 M_BL.P$25 M_BL.P$26 M_BL.P$27 M_BL.P$28 M_BL.SLUG1
N$39: M3Q1.1 M_BL.P11
N$40: M4R2.2 M4R3.1 M_BR.P9
N$41: M4R1.2 M4R4.1 M_BR.P5
N$42: M4R6.2 M_BR.P10
N$43: M4R5.2 M_BR.P4
N$44: M4R7.2 M_BR.P7
N$45: M3D1.A M3D2.C M3R12.1
N$46: M4R8.2 M4R10.2 M_BR.P8
N$47: M4R9.2 M_BR.P6
N$48: M4C2.1 M4C3.1 M4Q1.4 M_BR.P3 M_BR.P13 M_BR.P23 M_BR.P$19 M_BR.P$20 M_BR.P$21 M_BR.P$22 M_BR.P$23 M_BR.P$24 M_BR.P$25 M_BR.P$26 M_BR.P$27 M_BR.P$28 M_BR.SLUG1
N$49: M4Q1.1 M_BR.P11
N$50: M4D1.A M4D2.C M4R12.1
N$52: 2R1.2 MUX_L1.15
N$53: MUX_L1.16 Q1.E
N$54: MUX_L1.17 Q2.E
N$55: MUX_L1.18 Q3.E
N$56: MUX_L1.19 Q4.E
N$57: MUX_L1.20 Q5.E
N$58: MUX_L1.21 Q6.E
N$59: MUX_L1.22 Q7.E
N$60: MUX_L1.23 Q8.E
N$61: MUX_L1.2 Q9.E
N$62: MUX_L1.3 Q10.E
N$63: MUX_L1.4 Q11.E
N$64: MUX_L1.5 Q12.E
N$65: MUX_L1.6 Q13.E
N$66: MUX_L1.7 Q14.E
N$67: MUX_L1.8 Q15.E
N$68: MUX_L1.9 Q16.E
N$69: LD1.C LD2.C LD3.C LD4.C LD5.C LD6.C LD7.C LD8.C LD9.C LD10.C LD11.C LD12.C LD13.C LD14.C LD15.C LD16.C LD17.C LD18.C LD19.C LD20.C LD21.C LD22.C LD23.C LD24.C LD25.C LD26.C LD27.C LD28.C LD29.C LD30.C LD31.C LD32.C LD33.C LD34.C LD35.C LD36.C LR1.1
N$70: R2.2 RST.P$1
N$72: BOOT.P$1 R3.1
N$73: R5.2 U$2.19
N$74: D1.A R5.1
N$82: 2R2.2 MUX_L2.15
N$83: MUX_L2.16 Q17.E
N$84: MUX_L2.17 Q18.E
N$85: MUX_L2.18 Q19.E
N$86: MUX_L2.19 Q20.E
N$87: MUX_L2.20 Q21.E
N$88: MUX_L2.21 Q22.E
N$89: MUX_L2.22 Q23.E
N$90: MUX_L2.23 Q24.E
N$91: MUX_L2.2 Q25.E
N$92: MUX_L2.3 Q26.E
N$93: MUX_L2.4 Q27.E
N$94: MUX_L2.5 Q28.E
N$95: MUX_L2.6 Q29.E
N$96: MUX_L2.7 Q30.E
N$97: MUX_L2.8 Q31.E
N$98: MUX_L2.9 Q32.E
N$99: 2R3.2 MUX_L3.15
N$100: MUX_L3.16 Q33.E
N$101: MUX_L3.17 Q34.E
N$102: MUX_L3.18 Q35.E
N$103: MUX_L3.19 Q36.E
NOT_BL_DIR: M3R6.1 MU2.6
NOT_BR_DIR: M4R6.1 MU2.4
NOT_FL_DIR: M1R6.1 MU1.6
NOT_FR_DIR: M2R6.1 MU1.4
NRESET: MOUSE.3 U$2.42
OSC_IN: C6.2 U$2.5 Y1.P$2
OSC_OUT: C7.2 U$2.6 Y1.P$1
RESET: R1.1 RST.P$2 U$2.7
RX1: U$2.31 X2.6
RX3: U$2.22 U$15.11
SCK: MOUSE.6 U$2.39
SS: MOUSE.5 U$2.38
SWCLK: U$2.37 X2.2
SWDIO: U$2.34 X2.3
TX1: U$2.30 X2.5
TX3: U$2.21 U$15.9
V_BATT: 1C1.1 1C2.1 1C6.1 1C10.1 ESC_OUT.+ M1Q1.3 M2Q1.3 M3Q1.3 M4Q1.3 M_BL.P12 M_BR.P12 M_FL.P12 M_FR.P12 R6.2 U1.7 U2.7 U$1.+ V_BATT_M1A.P$1 V_BATT_M1B.P$1 V_BATT_M2A.P$1 V_BATT_M2B.P$1 V_BATT_M3A.P$1 V_BATT_M3B.P$1 V_BATT_M4A.P$1 V_BATT_M4B.P$1
VCCA: C4.2 C5.2 FB1.2 LDR.1 Q1.C Q2.C Q3.C Q4.C Q5.C Q6.C Q7.C Q8.C Q9.C Q10.C Q11.C Q12.C Q13.C Q14.C Q15.C Q16.C Q17.C Q18.C Q19.C Q20.C Q21.C Q22.C Q23.C Q24.C Q25.C Q26.C Q27.C Q28.C Q29.C Q30.C Q31.C Q32.C Q33.C Q34.C Q35.C Q36.C U$2.9

## Tracks (layer width: path | path; a pad name or v marks a point on that pad's centre or on a via)
3.3V  (36 unrouted)
3.3V1  (1 unrouted)
5V  (5 unrouted)
AGND  (9 unrouted)
BATT_LVL  (2 unrouted)
BL_CS  (2 unrouted)
BL_DIR  (2 unrouted)
BL_OUTA  (14 unrouted)
BL_OUTB  (13 unrouted)
BL_PWM  (2 unrouted)
BOOT0  (3 unrouted)
BR_CS  (2 unrouted)
BR_DIR  (2 unrouted)
BR_OUTA  (14 unrouted)
BR_OUTB  (13 unrouted)
BR_PWM  (2 unrouted)
ESC_HV  (2 unrouted)
ESC_LV  (2 unrouted)
FL_CS  (2 unrouted)
FL_DIR  (2 unrouted)
FL_OUTA  (14 unrouted)
FL_OUTB  (13 unrouted)
FL_PWM  (2 unrouted)
FR_CS  (2 unrouted)
FR_DIR  (2 unrouted)
FR_OUTA  (14 unrouted)
FR_OUTB  (13 unrouted)
FR_PWM  (2 unrouted)
GND  (73 unrouted)
  pour Top: -55.67,219.7 -55.67,-41.92 259.29,-41.92 259.29,219.7
  pour Bottom: -55.67,219.7 -55.67,-41.92 259.29,-41.92 259.29,219.7
GND_M  (17 unrouted)
LG_SIG  (2 unrouted)
LIGHT_INT  (1 unrouted)
LS0  (3 unrouted)
LS1  (3 unrouted)
LS2  (3 unrouted)
LS3  (3 unrouted)
LSIG1  (3 unrouted)
LSIG2  (3 unrouted)
LSIG3  (3 unrouted)
LSWITCH  (via drill 0.51)  (8 unrouted)
  Top 0.254: v156.42,121.91 156.42,118.1 v157.69,116.83 | v157.69,78.73 156.42,77.46 v156.42,74.92 | v39.58,73.65 39.58,77.46 v38.31,78.73 | v37.04,118.1 37.04,120.64 v38.31,121.91
  Bottom 0.254: v156.42,121.91 156.42,123.97 LD3.A 151.34,129.05 151.34,133.1 LD4.A 148.98,134.42 143.72,139.69 143.72,142.08 LD5.A 139.23,142.9 134.83,147.31 134.83,149.61 LD6.A 130.37,150.02 LD7.A 118.22,155.55 LD8.A 105.45,159.34 LD9.A 102.28,160.01 95.46,160.01 94.2,161.26 LD10.A 90.54,159.34 LD11.A 77.78,155.55 LD12.A 66.73,151.12 62.67,151.12 LD13.A 61.57,148.98 57.36,144.77 54.96,144.77 LD14.A 53.1,139.23 49.74,135.88 47.43,135.88 LD15.A 45.98,130.37 LD16.A 40.45,124.04 v38.31,121.91 | v157.69,116.83 159.33,115.18 LD2.A 159.33,105.46 LD1.A 161.25,100.07 160.23,99.05 160.23,93.49 LD36.A 159.33,90.54 LD35.A 157.69,79.92 v157.69,78.73 | v156.42,74.92 156.42,72.03 LD34.A 150.01,65.63 LD33.A 149.38,60.95 147.53,60.95 142.9,56.32 LD32.A 141.86,52.06 138.64,52.06 134.42,47.84 LD31.A 130.37,45.98 LD30.A | LD30.A | LD30.A 118.22,40.45 LD29.A 105.45,36.66 LD28.A 101.46,36.82 94.54,36.82 LD27.A 89.12,38.09 82.98,38.09 LD26.A 80.37,36.66 76.58,40.45 LD25.A 67.17,44.44 63.12,44.44 LD24.A 59.9,47.66 59.9,49.52 56.31,53.1 LD23.A 51.01,55.19 51.01,57.14 46.56,61.58 LD22.A 45.98,65.63 LD21.A 40.45,72.78 v39.58,73.65 | v38.31,78.73 36.66,80.37 LD20.A 36.66,90.54 LD19.A 34.74,94.21 37.04,96.51 37.04,99.05 34.5,101.59 34.5,103.29 LD18.A 37.04,105.83 37.04,114.06 LD17.A 37.04,114.81 v37.04,118.1
M_SWITCH  (8 unrouted)
MISO  (1 unrouted)
MOSI  (1 unrouted)
MOT  (1 unrouted)
N$1  (1 unrouted)
N$2  (3 unrouted)
N$3  (3 unrouted)
N$4  (2 unrouted)
N$5  (2 unrouted)
N$6  (1 unrouted)
N$11  (2 unrouted)
N$12  (2 unrouted)
N$13  (1 unrouted)
N$14  (1 unrouted)
N$15  (1 unrouted)
N$16  (2 unrouted)
N$17  (1 unrouted)
N$18  (3 unrouted)
N$19  (1 unrouted)
N$20  (2 unrouted)
N$21  (2 unrouted)
N$22  (2 unrouted)
N$23  (1 unrouted)
N$24  (1 unrouted)
N$25  (1 unrouted)
N$26  (2 unrouted)
N$27  (1 unrouted)
N$28  (3 unrouted)
N$29  (1 unrouted)
N$30  (2 unrouted)
N$31  (2 unrouted)
N$32  (2 unrouted)
N$33  (1 unrouted)
N$34  (1 unrouted)
N$35  (1 unrouted)
N$36  (2 unrouted)
N$37  (1 unrouted)
N$38  (3 unrouted)
N$39  (1 unrouted)
N$40  (2 unrouted)
N$41  (2 unrouted)
N$42  (1 unrouted)
N$43  (1 unrouted)
N$44  (1 unrouted)
N$45  (2 unrouted)
N$46  (2 unrouted)
N$47  (1 unrouted)
N$48  (3 unrouted)
N$49  (1 unrouted)
N$50  (2 unrouted)
N$52  (1 unrouted)
N$53  (1 unrouted)
N$54  (1 unrouted)
N$55  (1 unrouted)
N$56  (1 unrouted)
N$57  (1 unrouted)
N$58  (1 unrouted)
N$59  (1 unrouted)
N$60  (1 unrouted)
N$61  (1 unrouted)
N$62  (1 unrouted)
N$63  (1 unrouted)
N$64  (1 unrouted)
N$65  (1 unrouted)
N$66  (1 unrouted)
N$67  (1 unrouted)
N$68  (1 unrouted)
N$69  (1 unrouted)
  Bottom 0.254: 82.76,39.56 90.89,39.56 LD27.C LD28.C 105.1,39.56 LD29.C 117.26,43.17 LD30.C 128.84,48.44 LD31.C 139.48,55.22 LD32.C 140.78,56.52 LD33.C 147.56,67.16 LD34.C 152.83,72.6 156.42,76.19 156.42,82.32 LD35.C 156.44,90.9 LD36.C LD1.C 156.44,105.1 LD2.C 155.77,113.66 155.15,114.29 155.15,115.56 156.42,116.83 156.42,119.37 155.15,120.64 155.15,121.25 LD3.C 147.56,128.84 LD4.C 147.56,134 LD5.C 139.48,140.78 LD6.C 128.84,147.56 LD7.C 117.26,152.83 LD8.C 105.1,156.44 LD9.C LD10.C 90.89,156.44 LD11.C 78.73,152.83 LD12.C 68.17,148.58 64.31,148.58 LD13.C 62,147.56 LD14.C 55.22,139.48 LD15.C 48.44,128.84 LD16.C 39.58,119.98 39.58,113.68 LD17.C 39.56,105.1 LD18.C LD19.C 39.56,90.9 LD20.C 39.58,82.32 39.58,76.02 LD21.C 48.44,67.16 LD22.C 55.22,56.52 LD23.C 56.52,55.22 LD24.C 67.16,48.44 LD25.C 79.15,43.17 82.76,39.56 | 82.76,39.56 LD26.C
N$70  (1 unrouted)
N$72  (1 unrouted)
N$73  (1 unrouted)
N$74  (1 unrouted)
N$82  (1 unrouted)
N$83  (1 unrouted)
N$84  (1 unrouted)
N$85  (1 unrouted)
N$86  (1 unrouted)
N$87  (1 unrouted)
N$88  (1 unrouted)
N$89  (1 unrouted)
N$90  (1 unrouted)
N$91  (1 unrouted)
N$92  (1 unrouted)
N$93  (1 unrouted)
N$94  (1 unrouted)
N$95  (1 unrouted)
N$96  (1 unrouted)
N$97  (1 unrouted)
N$98  (1 unrouted)
N$99  (1 unrouted)
N$100  (1 unrouted)
N$101  (1 unrouted)
N$102  (1 unrouted)
N$103  (1 unrouted)
NOT_BL_DIR  (1 unrouted)
NOT_BR_DIR  (1 unrouted)
NOT_FL_DIR  (1 unrouted)
NOT_FR_DIR  (1 unrouted)
NRESET  (1 unrouted)
OSC_IN  (2 unrouted)
OSC_OUT  (2 unrouted)
RESET  (2 unrouted)
RX1  (1 unrouted)
RX3  (1 unrouted)
SCK  (1 unrouted)
SS  (1 unrouted)
SWCLK  (1 unrouted)
SWDIO  (1 unrouted)
TX1  (1 unrouted)
TX3  (1 unrouted)
V_BATT  (24 unrouted)
VCCA  (6 unrouted)
  Bottom 0.254: Q11.C 87.74,162.75 Q10.C 108.26,162.75 Q9.C 117.22,161.77 Q8.C 125.6,158.84 Q7.C 133.14,154.07 Q6.C 142.54,144.68 142.65,144.68 144.68,142.65 144.68,142.54 Q5.C 154.07,133.15 Q4.C 158.84,125.6 Q3.C 161.76,117.22 Q2.C 162.75,108.26 Q1.C 162.75,87.74 Q36.C 161.76,78.77 Q35.C 158.84,70.39 Q34.C 154.07,62.85 Q33.C 147.6,55.94 140.06,48.4 Q32.C 133.14,41.92 Q31.C 125.6,37.15 Q30.C 117.22,34.23 Q29.C 108.26,33.25 Q28.C 87.74,33.25 Q27.C 78.77,34.23 Q26.C 70.39,37.15 Q25.C 62.85,41.92 Q24.C 54.66,48.4 48.4,54.67 Q23.C 41.92,62.85 Q22.C 37.15,70.39 Q21.C 34.23,78.77 Q20.C 33.25,87.74 Q19.C 33.25,108.26 Q18.C 34.23,117.22 Q17.C 37.15,125.6 Q16.C 41.92,133.15 Q15.C 48.4,140.88 55.11,147.6 Q14.C 62.85,154.07 Q13.C 70.39,158.84 Q12.C 78.77,161.77 Q11.C